# EAGLE board stoichea_v0.2 (EAGLE 9.0.0)
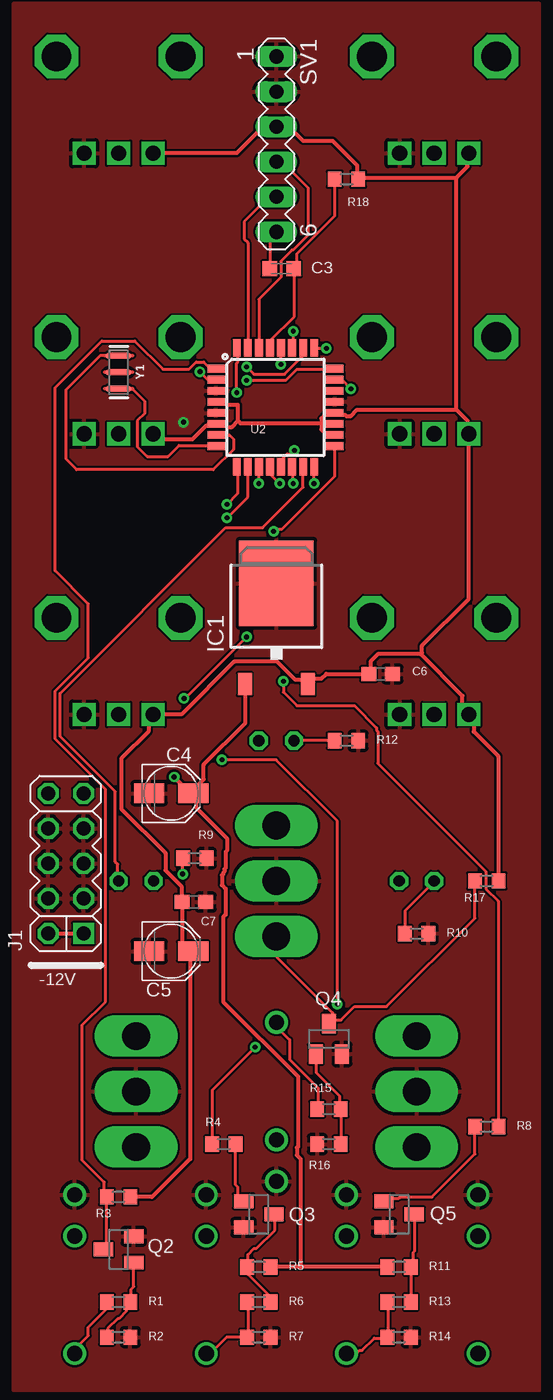
[diagram p0: board, top side]
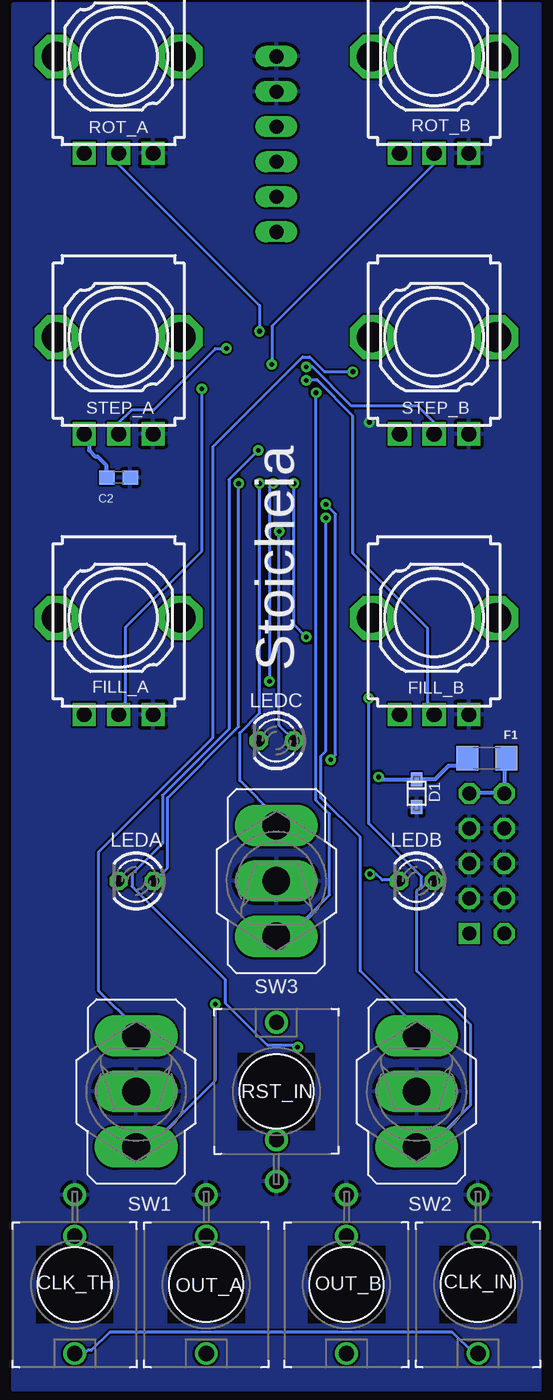
[diagram p1: board, bottom side, seen from below]

No outline drawn. Coordinates in mm, seen from the top.
Copper layers (1*16): Top 0.035mm / dielectric 1.5mm / Bottom 0.035mm
Design rules "default *": minimum track width 6mil, minimum drill 0.35mm, track to track 6mil, track to pad 6mil, pad to pad 6mil, via to via 6mil, smd to smd 6mil, copper to edge 40mil, drill to drill 6mil, minimum pad ring 10mil, minimum via ring 8mil, stop-mask expansion 4mil, vias tented up to drill 15mil, thermal gap 10mil
Net classes: 0 default: width 0.203 mm; 1 GND: width 0.305 mm

## Footprints (pad centres in the part's own frame; a part is rotated, then mirrored left to right if it is on the bottom)
C0603 = smd 1.1 x 1: 1 -0.85,0; 2 0.85,0
C0603K = smd 1.05 x 1.08: 1 -0.875,0; 2 0.875,0
PANASONIC_B = smd 2.2 x 1.4: + 1.6,0; - -1.6,0
WQP-PJ301M-12_JACK = drill 1.1: P$1_TIP 0,5; P$2_SWITCH 0,-3.5; P$3_SLEEVE 0,-6.5
SOD-323F = smd 1 x 0.8: A -1,0; C 1,0
1206 = smd 1.6 x 1.8: 1 -1.4,0; 2 1.4,0
9MM_PLS = drill 1.1 pad 1.676 square: 1 -2.5,-7; 2 0,-7; 3 2.5,-7 | drill 2.159 pad 3.175 octagon: M1 4.5,0; M2 -4.5,0
TO252 = smd 1 x 1.6: 1 -2.28,-4.8; 2 2.28,-4.8 | smd 5.4 x 6.2: 3 0,2.5
2X05_EUROPWR_OPEN = drill 1.016 square: 1 -5.08,-1.27 | drill 1.016 octagon: 2 -5.08,1.27; 3 -2.54,-1.27; 4 -2.54,1.27; 5 0,-1.27; 6 0,1.27; 7 2.54,-1.27; 8 2.54,1.27; 9 5.08,-1.27; 10 5.08,1.27
LED3MM = drill 0.813 octagon: A -1.27,0; K 1.27,0
SOT23-BEC = smd 1 x 1.4: B -0.95,-1.1; C 0,1.1; E 0.95,-1.1
R0603 = smd 1 x 1.1: 1 -0.85,0; 2 0.85,0
MA06-1 = drill 1.016 long: 1 -6.35,0; 2 -3.81,0; 3 -1.27,0; 4 1.27,0; 5 3.81,0; 6 6.35,0
320-916 = drill 2.007 long: 1 0,4.013; 2 0,0; 3 0,-4.013
TQFP32-08 = smd 1.27 x 0.559: 1 -4.293,2.8; 2 -4.293,2; 3 -4.293,1.2; 4 -4.293,0.4; 5 -4.293,-0.4; 6 -4.293,-1.2; 7 -4.293,-2; 8 -4.293,-2.8; 17 4.293,-2.8; 18 4.293,-2; 19 4.293,-1.2; 20 4.293,-0.4; 21 4.293,0.4; 22 4.293,1.2; 23 4.293,2; 24 4.293,2.8 | smd 0.559 x 1.27: 9 -2.8,-4.293; 10 -2,-4.293; 11 -1.2,-4.293; 12 -0.4,-4.293; 13 0.4,-4.293; 14 1.2,-4.293; 15 2,-4.293; 16 2.8,-4.293; 25 2.8,4.293; 26 2,4.293; 27 1.2,4.293; 28 0.4,4.293; 29 -0.4,4.293; 30 -1.2,4.293; 31 -2,4.293; 32 -2.8,4.293
RESONATOR-SMD-3.2X1.3 = smd 0.45 x 1.905: 1 -1.2,0; 2 0,0; 3 1.2,0

## Placement (x,y rotation side)
C2  100n  [C0603]  30.48,66.04 0 bottom
C3  100n  [C0603K]  19.43,81.15 0 top
C4  10u  [PANASONIC_B]  11.43,43.18 0 top
C5  10u  [PANASONIC_B]  11.43,31.75 0 top
C6  100n  [C0603]  26.61,51.82 0 top
C7  100n  [C0603]  13.08,35.31 0 top
CLK_IN  JACK_THONKICONN-WQP-PJ301M-12  [WQP-PJ301M-12_JACK]  4.45,7.62 180 bottom
CLK_TH  JACK_THONKICONN-WQP-PJ301M-12  [WQP-PJ301M-12_JACK]  33.66,7.62 180 bottom
D1  SS14  [SOD-323F]  8.89,43.18 90 bottom
F1  6V/0.5A  [1206]  3.81,45.72 180 bottom
FILL_A  POT_9MM_PCB-PLS  [9MM_PLS]  30.48,55.88 0 bottom
FILL_B  POT_9MM_PCB-PLS  [9MM_PLS]  7.62,55.88 0 bottom
IC1  7805DT  [TO252]  19.05,55.88 0 top
J1  HEADER-EUROPWR_2X05-OPEN  [2X05_EUROPWR_OPEN]  3.81,38.1 90 top
LEDA  [LED3MM]  29.21,36.83 180 bottom
LEDB  [LED3MM]  8.89,36.83 180 bottom
LEDC  [LED3MM]  19.05,46.99 180 bottom
OUT_A  JACK_THONKICONN-WQP-PJ301M-12  [WQP-PJ301M-12_JACK]  24.13,7.62 180 bottom
OUT_B  JACK_THONKICONN-WQP-PJ301M-12  [WQP-PJ301M-12_JACK]  13.97,7.62 180 bottom
Q2  MMBT3904  [SOT23-BEC]  7.62,10.16 90 top
Q3  MMBT3904  [SOT23-BEC]  17.78,12.7 270 top
Q4  MMBT3904  [SOT23-BEC]  22.86,25.4 0 top
Q5  MMBT3904  [SOT23-BEC]  27.94,12.7 270 top
R1  100k  [R0603]  7.62,6.35 0 top
R2  1m  [R0603]  7.62,3.81 180 top
R3  10k  [R0603]  7.62,13.97 0 top
R4  1k  [R0603]  15.24,17.78 0 top
R5  1k  [R0603]  17.78,8.89 0 top
R6  100R  [R0603]  17.78,6.35 0 top
R7  1k  [R0603]  17.78,3.81 180 top
R8  1k  [R0603]  34.29,19.05 180 top
R9  1K  [R0603]  13.14,38.48 180 top
R10  1K  [R0603]  29.21,33.02 180 top
R11  1k  [R0603]  27.94,8.89 180 top
R12  1K  [R0603]  24.13,46.99 180 top
R13  100R  [R0603]  27.94,6.35 0 top
R14  1k  [R0603]  27.94,3.81 180 top
R15  100k  [R0603]  22.86,20.32 0 top
R16  1M  [R0603]  22.86,17.78 0 top
R17  10k  [R0603]  34.29,36.83 0 top
R18  10k  [R0603]  24.13,87.63 180 top
ROT_A  POT_9MM_PCB-PLS  [9MM_PLS]  30.48,96.52 0 bottom
ROT_B  POT_9MM_PCB-PLS  [9MM_PLS]  7.62,96.52 0 bottom
RST_IN  JACK_THONKICONN-WQP-PJ301M-12  [WQP-PJ301M-12_JACK]  19.05,21.59 0 bottom
STEP_A  POT_9MM_PCB-PLS  [9MM_PLS]  30.48,76.2 0 bottom
STEP_B  POT_9MM_PCB-PLS  [9MM_PLS]  7.62,76.2 0 bottom
SV1  [MA06-1]  19.05,90.17 270 top
SW1  [320-916]  29.21,21.59 180 bottom
SW2  [320-916]  8.89,21.59 180 bottom
SW3  [320-916]  19.05,36.83 0 bottom
U2  ATMEGA328P_TQFP  [TQFP32-08]  18.99,71.12 0 top
Y1  16MHz  [RESONATOR-SMD-3.2X1.3]  7.62,73.66 270 top

## Library data of the parts
C2-C7 CLK_IN CLK_TH FILL_A FILL_B J1 LEDA LEDB LEDC OUT_A OUT_B Q2-Q5 R1-R18 ROT_A ROT_B RST_IN STEP_A STEP_B SW1-SW3 Y1 = 0000-master
D1 = adafruit
F1 = 0000-master; PROD_ID: RES-08585
IC1 = linear
SV1 = con-lstb; OC_FARNELL: unknown; OC_NEWARK: unknown
U2 = SparkFun-IC-Microcontroller; PROD_ID: IC-09069

## Nets
5V [GND]: C2.1 C5.+ C6.1 C7.1 FILL_A.1 FILL_B.1 IC1.2 R3.2 R17.2 R18.1 ROT_A.1 ROT_B.1 STEP_A.1 STEP_B.1 SV1.3 U2.4 U2.6 U2.18 U2.20
+12V [GND]: C4.+ D1.C F1.2 IC1.1 R5.2 R11.2
-12V [GND]: J1.1 J1.2
ALTA: SW1.1 U2.9
ALTB: SW2.1 U2.11
CHN: SW3.1 U2.14
CLKIN: Q2.C R3.1 U2.1
N$1: LEDB.K R9.2
N$2: LEDA.K R10.2
N$3: LEDC.K R12.2
N$4: LEDB.A U2.15
N$5: LEDA.A U2.16
N$6: LEDC.A U2.17
N$8: CLK_IN.P$1_TIP CLK_TH.P$1_TIP R1.1
N$9 [GND]: F1.1 J1.9 J1.10
N$11: Q2.B R1.2 R2.2
N$12: Q3.B R4.2
N$13: Q3.C R5.1 R6.2
N$14: OUT_B.P$1_TIP R6.1 R7.2
N$15: Q5.B R8.2
N$16: Q5.C R11.1 R13.2
N$17: OUT_A.P$1_TIP R13.1 R14.2
N$18: R15.1 RST_IN.P$1_TIP
N$19: C3.2 R18.2 U2.29
N$20: Q4.B R15.2 R16.2
N$21: C3.1 SV1.6
N$22: FILL_A.2 U2.23
N$23: FILL_B.2 U2.24
N$24: STEP_A.2 U2.25
N$25: STEP_B.2 U2.26
N$26: ROT_A.2 U2.27
N$27: ROT_B.2 U2.28
N$28: U2.8 Y1.3
N$29: U2.7 Y1.1
OUTA: R8.1 U2.12
OUTB: R4.1 U2.13
PE: C2.2 C4.- C5.- C6.2 C7.2 CLK_IN.P$3_SLEEVE CLK_TH.P$3_SLEEVE D1.A FILL_A.3 FILL_B.3 IC1.3 J1.3 J1.4 J1.5 J1.6 J1.7 J1.8 OUT_A.P$3_SLEEVE OUT_B.P$3_SLEEVE Q2.E Q3.E Q4.E Q5.E R2.1 R7.1 R9.1 R10.1 R12.1 R14.1 R16.1 ROT_A.3 ROT_B.3 RST_IN.P$3_SLEEVE STEP_A.3 STEP_B.3 SV1.1 SV1.2 SW1.2 SW2.2 SW3.2 U2.3 U2.5 U2.21 Y1.2
RSTIN: Q4.C R17.1 SW3.3 U2.32
RX: SV1.4 U2.30
TRIGA: SW1.3 U2.2
TRIGB: SW2.3 U2.10
TX: SV1.5 U2.31

## Tracks (layer width: path | path; a pad name or v marks a point on that pad's centre or on a via)
5V
  Top 0.305: ROT_B.1 10.13,89.52 16.18,89.52 18.05,91.39 18.94,91.39 SV1.3 19.11,91.39 20,91.39 20.98,90.41 23.11,90.41 24.89,88.63 24.89,87.66 R18.1 25.07,87.74 32.09,87.74 | 32.09,87.74 32.89,88.54 32.89,89.43 ROT_A.1 | 22.31,69.96 22.31,70.32 22.58,70.59 23.11,70.59 23.2,70.67 U2.20 23.29,70.59 24,70.59 24.09,70.5 24.45,70.5 24.89,70.94 32.09,70.94 | 22.31,69.96 22.31,69.52 22.67,69.16 23.2,69.16 U2.18 | STEP_B.1 10.13,69.16 10.49,68.81 12.98,68.81 13.96,69.79 14.05,69.79 14.13,69.88 14.67,69.88 U2.6 14.76,69.79 15.38,69.79 15.47,69.7 15.82,69.7 16.27,70.14 | 16.27,70.14 16.27,71.3 16.09,71.28 16,71.28 15.82,71.3 15.47,71.3 15.38,71.39 15.29,71.39 15.2,71.48 14.76,71.48 U2.4 | 22.31,69.96 16.45,69.96 16.27,70.14 | 32.09,70.94 32.89,70.14 32.89,69.25 STEP_A.1 32.98,69.08 32.98,57.25 29.6,53.87 29.6,53.34 29.52,53.25 | 32.09,70.94 32.09,87.74 | R3.2 8.53,13.96 10.05,13.96 12.8,16.71 12.8,31.56 12.98,31.74 C5.+ 12.8,31.74 12.27,32.27 12.27,35.29 C7.1 12.18,35.38 12.18,36.45 11.02,37.6 11.02,38.85 7.82,42.05 7.82,45.7 9.78,47.65 9.78,48.54 10.05,48.81 FILL_B.1 10.13,48.9 12.18,48.9 16,52.72 19.11,52.72 20.45,51.38 21.07,51.38 21.25,51.21 IC1.2 21.34,51.12 21.69,51.47 22.31,51.47 22.67,51.83 25.69,51.83 C6.1 25.87,51.92 25.87,52.72 26.4,53.25 29.52,53.25 | R17.2 35.12,36.89 35.12,45.87 33.34,47.65 33.34,48.45 32.98,48.81 FILL_A.1 32.89,48.98 32.54,49.34 32.54,50.23 29.52,53.25
  Bottom 0.305: C2.1 31.38,66.05 31.38,66.94 32,67.56 32.18,67.56 32.63,68.01 32.63,68.9 32.89,69.16 STEP_A.1
+12V  (via drill 0.35)
  Top 0.305: R11.2 20.8,8.89 | 20.8,8.89 R5.2 | IC1.1 16.8,51.03 16.8,48.27 13.78,45.25 13.78,44.18 13.07,43.47 13.07,43.2 C4.+ | v11.65,44.36 12.45,43.56 12.98,43.56 C4.+ | 20.8,8.89 20.8,16.71 20.54,16.98 20.54,17.51 20.62,17.6 20.62,22.67 15.2,28.09 15.2,34.23 15.38,34.4 15.38,36.27 15.11,36.54 15.11,37.25 15.2,37.34 15.2,37.43 15.29,37.52 15.29,37.69 15.38,37.78 15.38,38.94 15.47,39.03 15.47,39.92 13.25,42.14 13.25,42.85 13.07,43.03 C4.+
  Bottom 0.305: F1.2 5.25,45.7 5.78,45.16 6.58,45.16 7.56,44.18 D1.C 8.98,44.18 11.47,44.18 v11.65,44.36
-12V
  Top 0.305: J1.2 2.58,32.98 5.07,32.98 J1.1
ALTA  (via drill 0.35)
  Top 0.203: v15.47,64.1 16.27,64.9 16.27,66.76 U2.9 | v15.11,45.61 19.02,45.61 23.47,41.16 v23.47,27.91
  Bottom 0.203: v15.47,64.1 14.76,63.39 14.76,45.96 v15.11,45.61 | v23.47,27.91 23.47,22.4 28.27,17.6 29.16,17.6 SW1.1
ALTB  (via drill 0.35)
  Top 0.203: v17.78,65.61 17.78,66.76 U2.11 | v16.89,54.5 12.45,50.05 v12.36,50.05
  Bottom 0.203: v17.78,65.61 17.78,55.38 v16.89,54.5 | v12.36,50.05 12.36,40.98 8.53,37.16 8.53,36.45 8.89,36.09 8.89,30.32 4.98,26.4 4.98,20.62 8,17.6 8.89,17.6 SW2.1
CHN  (via drill 0.35)
  Top 0.203: v20.27,65.61 20.27,66.76 U2.14
  Bottom 0.203: v20.27,65.61 20.27,48.98 21.69,47.56 21.69,44.09 19.11,41.52 19.11,40.89 SW3.1
CLKIN
  Top 0.203: Q2.C 6.58,10.22 6.76,10.4 6.76,13.96 R3.1 6.76,14.05 6.58,14.22 6.58,15.02 4.98,16.62 4.98,26.4 6.67,28.09 6.67,43.47 3.02,47.12 3.02,50.58 5.42,52.98 5.42,56.9 3.02,59.3 3.02,72.54 6.4,75.92 8.8,75.92 10.85,73.88 12.71,73.88 13.25,74.41 13.78,74.41 14.22,73.97 14.67,73.97 U2.1
N$1  (via drill 0.35)
  Top 0.203: v12.27,37.34 12.27,38.41 R9.2
  Bottom 0.203: v12.27,37.34 11.82,37.34 11.38,36.89 10.22,36.89 LEDB.K
N$2
  Top 0.203: R10.2 28.36,33.07 28.36,34.67 30.49,36.8 LEDA.K
N$3
  Top 0.203: R12.2 23.2,47.03 20.36,47.03 LEDC.K
N$4
  Top 0.203: U2.15 20.98,66.76 20.98,65.34 18.05,62.41 15.38,62.41 3.38,50.41 3.38,47.3 7.38,43.29 7.38,38.23 7.56,38.05 7.56,36.89 LEDB.A
N$5  (via drill 0.35)
  Top 0.203: v21.78,65.61 21.78,66.76 U2.16
  Bottom 0.203: v21.78,65.61 21.78,48.01 26.94,42.85 26.94,37.78 27.91,36.8 LEDA.A
N$6  (via drill 0.35)
  Top 0.203: v18.85,62.14 19.02,62.32 19.47,62.32 23.29,66.14 23.29,68.28 U2.17
  Bottom 0.203: v18.85,62.14 18.85,48.09 17.78,47.03 LEDC.A
N$8
  Top 0.203: CLK_IN.P$1_TIP 4.45,2.93 5.42,3.91 5.42,4.53 6.76,5.87 6.76,6.31 R1.1
  Bottom 0.203: CLK_TH.P$1_TIP 33.6,2.67 32.89,2.67 32.72,2.85 32.45,2.85 31.11,4.18 6.31,4.18 4.8,2.67 4.45,2.67 CLK_IN.P$1_TIP
N$9
  Bottom 0.305: F1.1 2.49,45.7 2.49,43.2 J1.10 2.67,43.2 5.07,43.2 J1.9
N$11
  Top 0.203: R2.2 6.84,3.82 6.84,4.45 7.56,5.16 7.64,5.16 8.18,5.69 8.18,6.04 8.45,6.31 R1.2 8.53,6.4 8.53,7.29 8.71,7.47 8.71,9.16 Q2.B
N$12
  Top 0.203: R4.2 16.09,14.85 16.27,14.67 16.27,14.05 16.62,13.69 Q3.B
N$13
  Top 0.203: R6.2 18.58,6.4 18.58,6.76 16.98,8.36 16.98,8.89 R5.1 16.98,8.98 16.98,9.78 17.42,10.22 17.6,10.22 18.94,11.56 18.94,12.62 Q3.C
N$14
  Top 0.203: R6.1 16.98,6.31 16.98,3.82 R7.2 16.89,3.82 15.47,3.82 14.31,2.67 14.05,2.67 OUT_B.P$1_TIP
N$15
  Top 0.203: R8.2 33.43,19.02 33.43,17.07 30.32,13.96 28,13.96 27.91,13.87 27.03,13.87 26.85,13.69 Q5.B
N$16
  Top 0.203: R13.2 28.8,6.4 28.8,8.89 R11.1 28.8,8.98 28.98,9.16 28.98,9.96 29.07,10.05 29.07,12.62 Q5.C
N$17
  Top 0.203: R13.1 27.11,6.31 27.11,3.82 R14.2 27.03,3.73 26.14,3.73 25.25,2.85 25.07,2.85 24.89,2.67 24.18,2.67 OUT_A.P$1_TIP
N$18
  Top 0.203: R15.1 22.05,20.36 22.05,21.87 20,23.91 20,25.34 19.11,26.23 19.11,26.58 RST_IN.P$1_TIP
N$19
  Top 0.203: U2.29 18.67,75.48 18.67,76.01 20.36,77.7 20.36,81.08 C3.2 20.36,81.17 20.54,81.34 20.54,82.23 23.29,84.99 23.29,87.57 R18.2
N$20
  Top 0.203: R16.2 23.74,17.78 23.74,20.27 R15.2 23.65,20.36 23.65,21.25 21.96,22.94 21.96,24.27 Q4.B
N$21
  Top 0.203: C3.1 18.58,81.17 18.58,83.3 19.02,83.74 SV1.6
N$22  (via drill 0.35)
  Top 0.203: v24.45,72.45 23.82,73.08 23.29,73.08 U2.23
  Bottom 0.203: v24.45,72.45 24.45,60.72 29.96,55.21 29.96,49.34 30.4,48.9 FILL_A.2
N$23  (via drill 0.35)
  Top 0.203: v16.89,73.08 19.74,73.08 20.54,73.88 23.2,73.88 U2.24
  Bottom 0.203: v16.89,73.08 16.09,73.08 13.51,70.5 13.51,60.54 8.09,55.12 8.09,49.34 7.64,48.9 FILL_B.2
N$24  (via drill 0.35)
  Top 0.203: v22.67,75.39 21.87,75.39 U2.25
  Bottom 0.203: v22.67,75.39 23.47,75.39 27.91,70.94 29.52,70.94 30.49,69.96 30.49,69.25 STEP_A.2
N$25  (via drill 0.35)
  Top 0.203: v16.89,74.05 17.42,73.52 19.65,73.52 20.98,74.85 20.98,75.39 U2.26
  Bottom 0.203: v16.89,74.05 16.45,74.05 13.6,71.21 8.8,71.21 7.56,69.96 7.56,69.25 STEP_B.2
N$26  (via drill 0.35)
  Top 0.203: v20.27,76.63 20.27,75.48 U2.27
  Bottom 0.203: v20.27,76.63 20.27,78.5 30.49,88.72 30.49,89.43 ROT_A.2
N$27  (via drill 0.35)
  Top 0.203: v19.38,74.23 19.38,75.39 U2.28
  Bottom 0.203: v19.38,74.23 19.38,76.99 7.64,88.72 7.64,89.43 ROT_B.2
N$28
  Top 0.203: U2.8 14.67,68.36 12,68.36 11.2,67.56 9.69,67.56 8.98,68.28 8.98,70.14 9.51,70.67 9.51,71.56 8.71,72.36 Y1.3
N$29
  Top 0.203: 14.76,69.08 U2.7 15.65,69.12 15.94,68.83 15.94,68.07 14.48,66.61 4.57,66.61 3.81,67.37 3.81,72.39 6.28,74.86 Y1.1
OUTA  (via drill 0.35)
  Top 0.203: v19.56,51.3 19.56,50.49 20.54,49.52 24.71,49.52 26.31,47.92 26.31,47.74 26.4,47.65 26.4,45.34 34.23,37.52 34.23,36.27 35.12,35.38 35.12,19.11 R8.1 | v19.29,65.61 18.67,66.23 18.67,66.76 U2.12
  Bottom 0.203: v19.56,51.3 19.56,65.34 v19.29,65.61
OUTB  (via drill 0.35)
  Top 0.203: v17.51,24.8 14.4,21.69 14.4,17.78 R4.1 | v20.36,68.01 20.09,67.74 19.82,67.74 19.47,67.39 19.47,66.85 U2.13
  Bottom 0.203: v17.51,24.8 17.69,24.98 19.74,24.98 22.76,28 22.76,29.69 29.52,36.45 29.52,37.34 27.29,39.56 27.29,43.03 22.49,47.83 22.49,65.88 v20.36,68.01
PE  (via drill 0.35)
  other vias: 12.32,70.04
  pour Top: 0,0 38.1,0 38.1,100.33 0,100.33
  pour Bottom: 0,0 38.1,0 38.1,100.33 0,100.33
RSTIN  (via drill 0.35)
  Top 0.203: R17.1 33.43,36.8 33.43,34.14 27.03,27.74 24.71,27.74 23.74,26.76 23.11,26.76 22.94,26.58 Q4.C 23.11,26.85 23.11,27.29 19.02,31.38 19.02,32.8 SW3.3 | v16.18,72.19 16.18,74.32 16.27,74.41 16.27,75.39 U2.32
  Bottom 0.203: v16.18,72.19 16.18,42.67 15.2,41.69 15.2,35.83 18.14,32.89 19.02,32.89 SW3.3
RX
  Top 0.203: SV1.4 19.65,88.9 20.27,88.28 20.27,88.1 21.34,87.03 21.34,83.57 20.27,82.5 20.18,82.5 19.38,81.7 19.38,80.54 17.78,78.94 17.78,75.48 U2.30
TRIGA  (via drill 0.35)
  Top 0.203: v13.51,73.7 14.05,73.17 14.67,73.17 U2.2
  Bottom 0.203: v13.51,73.7 15.56,73.7 16.62,74.77 17.16,74.77 23.65,68.28 23.65,47.21 31.91,38.94 31.91,28.89 29.25,26.23 29.25,25.6 SW1.3
TRIGB  (via drill 0.35)
  Top 0.203: v15.47,63.12 16.98,64.63 16.98,66.76 U2.10
  Bottom 0.203: v15.47,63.12 15.47,46.23 15.82,45.87 15.82,42.85 12.98,40.01 12.98,30.32 8.89,26.23 SW2.3
TX
  Top 0.203: U2.31 16.98,75.48 16.98,83.03 16.71,83.3 16.71,84.54 18.49,86.32 19.02,86.32 SV1.5

## Text on the board
bNames: Stoicheia
tDocu: Rebel Tech Stoicheia